# Altium PCB HLK-7621-ALL-KIT-V2.4.PcbDoc (part 1 of 2)
Units mm, origin at the board's own origin, x right, y up, seen from the top; angles counter-clockwise.
Board outline 140 x 100 mm, 2 copper layers (Top Layer, Bottom Layer); 119 components, 240 nets, 725 pads, 586 vias.
Unrouted connection lines stored in the file: 2.
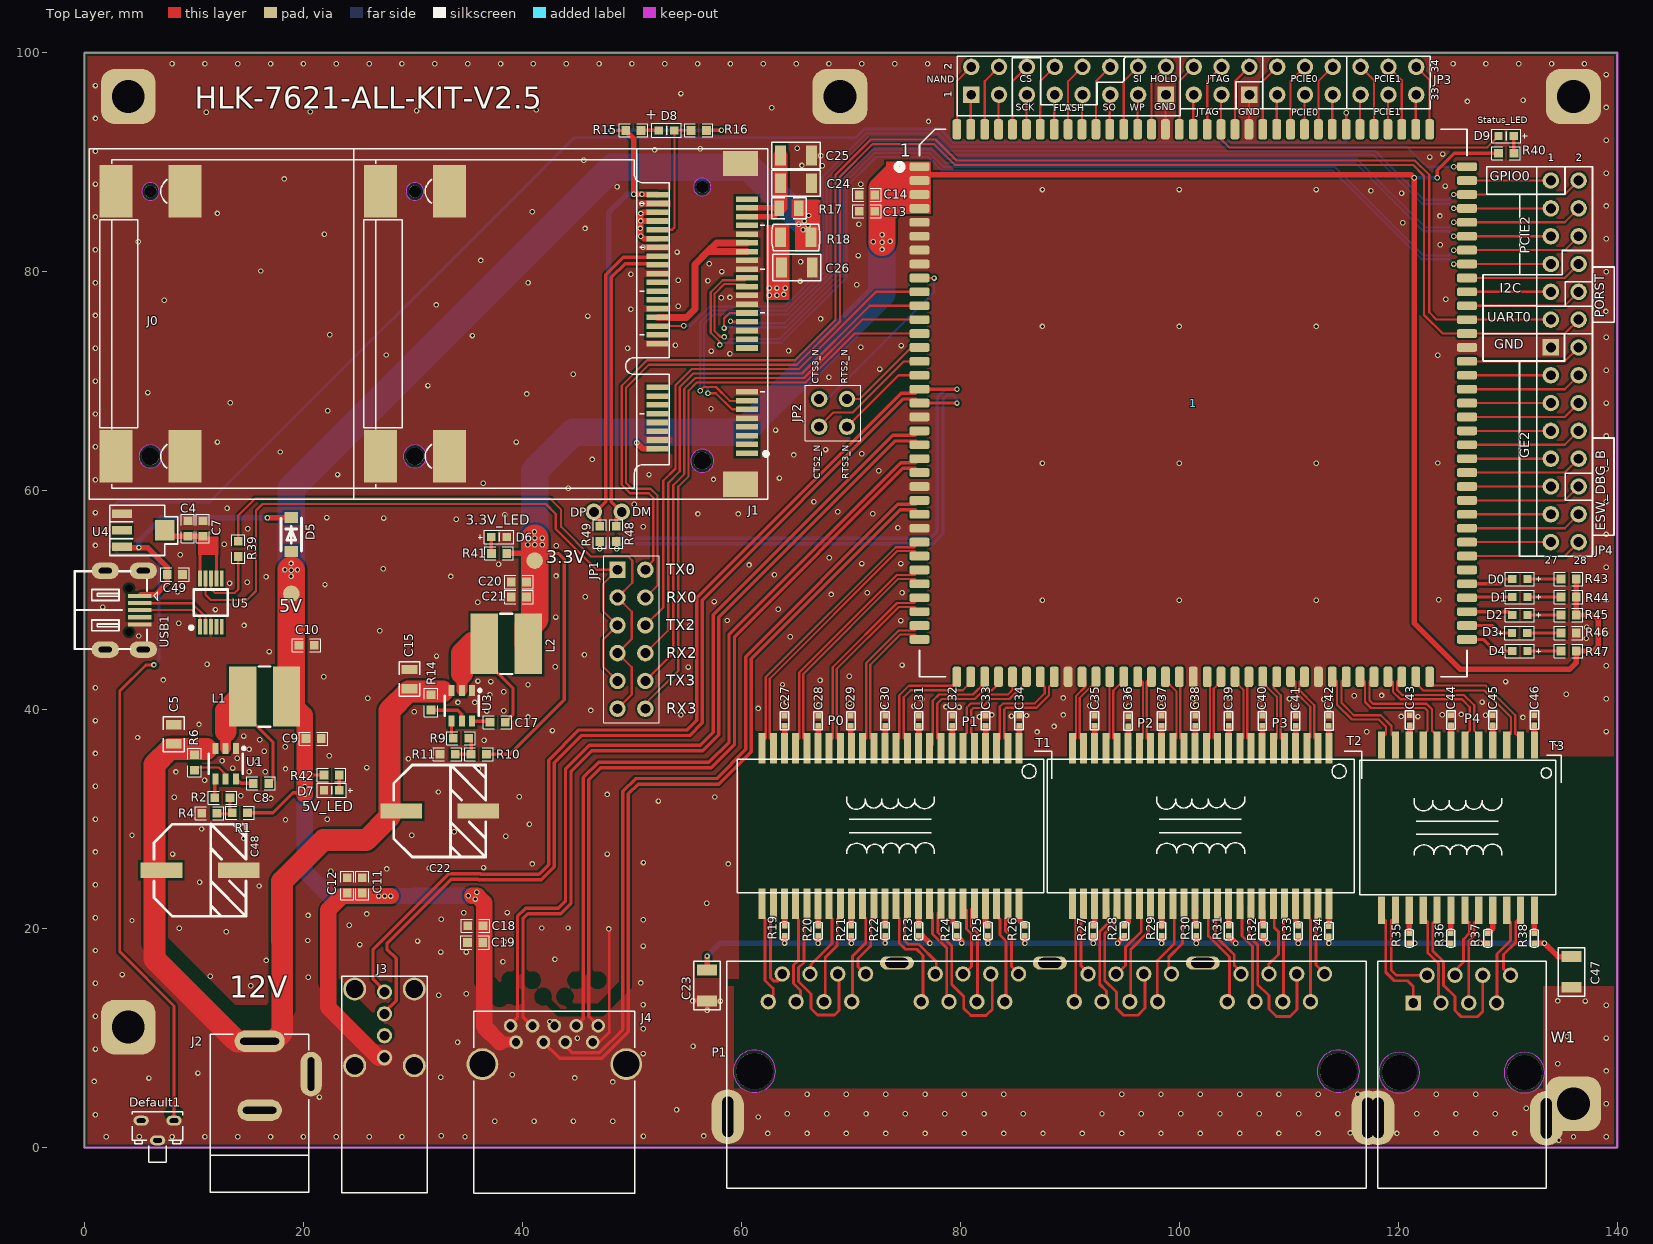
[diagram p0: Top Layer view]
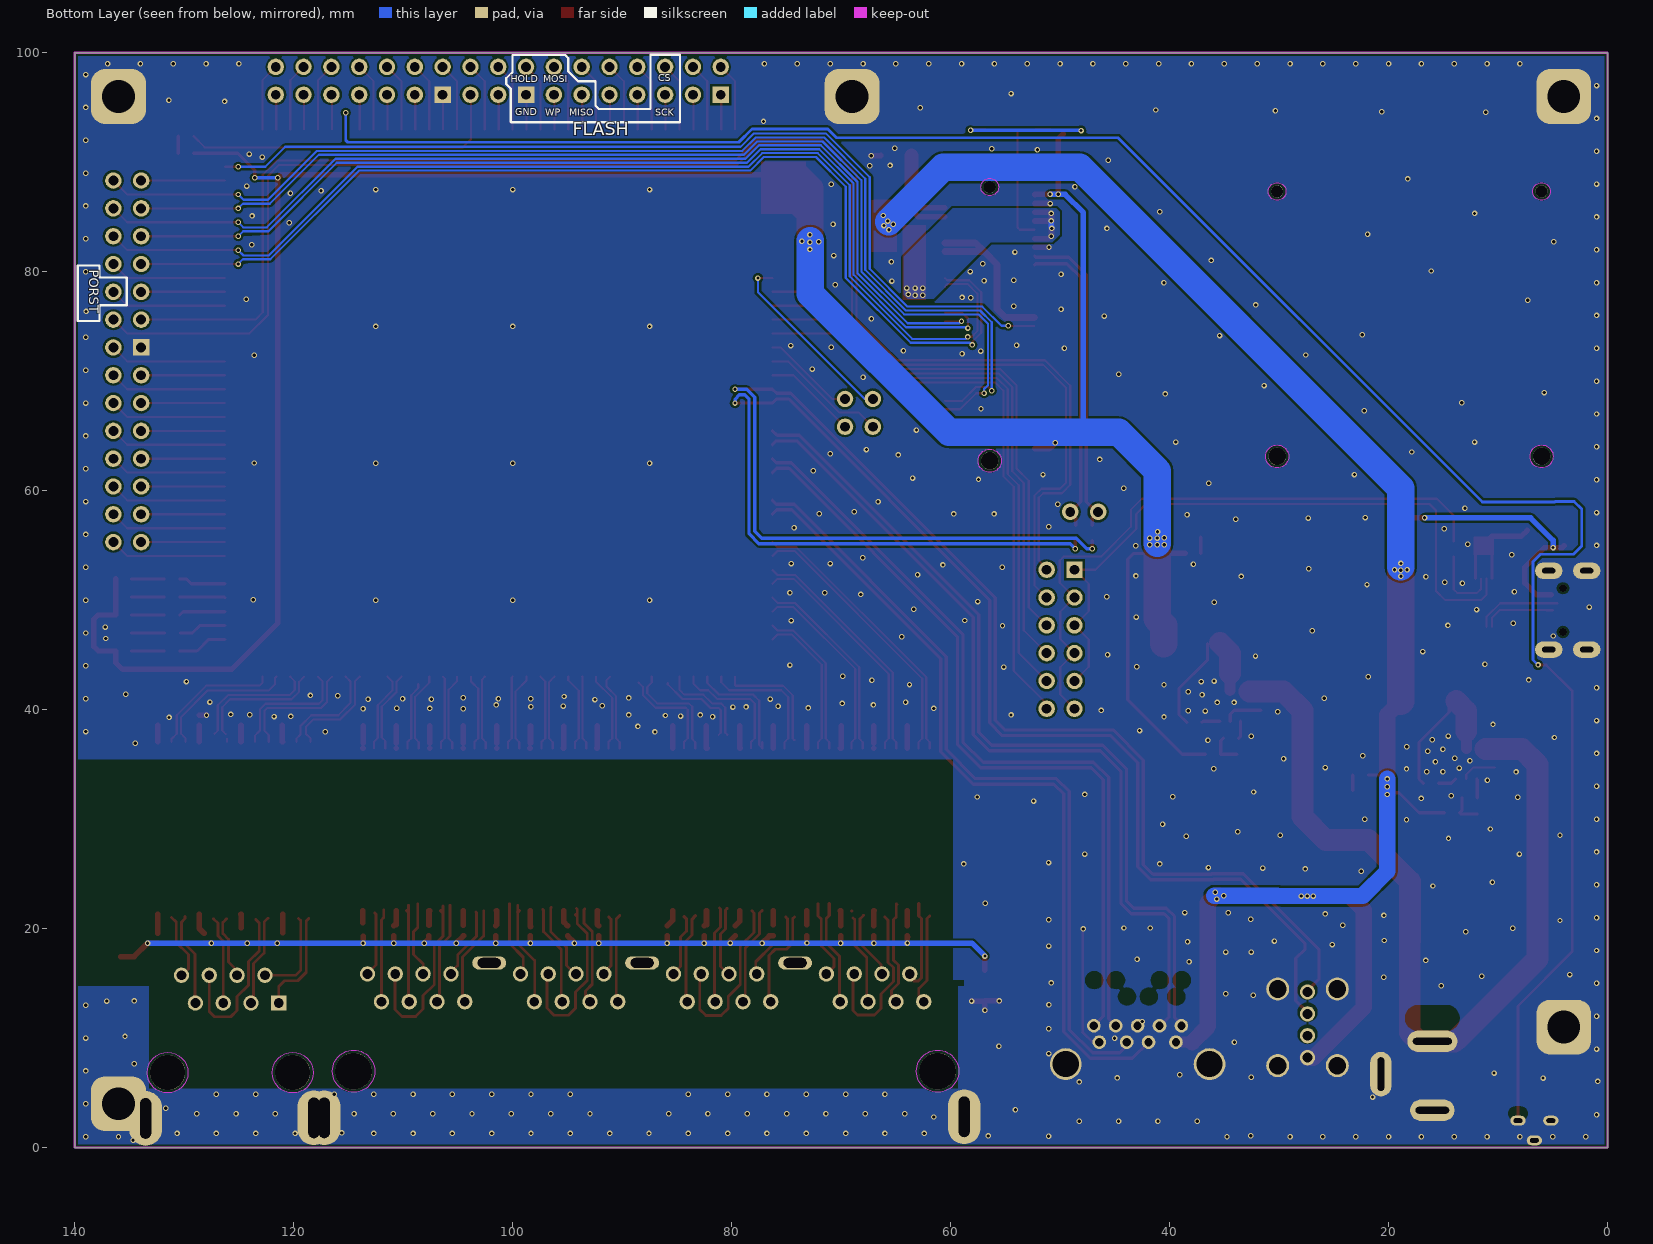
[diagram p1: Bottom Layer view, seen from below]

## Layer stack, top to bottom
Top Layer: signal copper 0.0356
Dielectric: core 0.32, FR-4, Dk 4.8
Bottom Layer: signal copper 0.0356

## Board outline
0,0 140,0 140,100 0,100

## Design rules (kind name [scope] priority, off if disabled: settings)
Clearance [All] p1: gap=0.2
PlaneConnect [All] p1: planeconnectstyle=Direct reliefexpansion=0.508 reliefentries=4 reliefconductorwidth=0.254 reliefairgap=0.254
PolygonConnect [All] p1: connectstyle=Direct reliefconductorwidth=0.254 reliefentries=4 polygonreliefangle="90 Angle"
RoutingVias [All] p1: holewidth=0.3 width=0.5 viastyle="Through Hole" minholewidth=0.3 minwidth=0.5 maxholewidth=0.711 maxwidth=1.27
SilkscreenOverComponentPads [IsPad] p1: minsilkscreentomaskgap=0.254
SolderMaskExpansion [All] p1: expansion=0.05
TestPointUsage [All] p1: valid=0 allowmultiple=FALSE
Testpoint [(IsPad And (OnTopLayer Or OnBottomLayer))] p1: side=3 testpointundercomponent=TRUE minsize=1.016 maxsize=2.54 preferedsize=1.524 minholesize=0 maxholesize=1.016 preferedholesize=0.813 testpointgrid=0.025 style=297 order=0123456789
Width [All] p1: maxlimit=2.54 minlimit=0.152 preferedwidth=0.254
22 further rules are at their usual default settings.

## Components (designator, comment, footprint, x,y, rotation, side; value= is the part's Value field where it differs from the comment)
1 "7621" HLK-7621 76.27,89.59 r0 top
C4 "10uF" 0603 9.446,56.544 r90 top
C5 "10uF/25V" L0805 8.151,37.76 r90 top
C7 "0.1uF" 0603 10.818,56.544 r90 top
C8 "1uF/25V" 0603 16.127,33.264 r180 top
C9 "22uf" 0603 20.927,37.353 r0 top
C10 "22uF" 0603 20.292,45.888 r0 top
C11 "22uF" 0603 25.372,23.942 r90 top
C12 "0.1uF" 0603 24.001,23.942 r90 top
C13 "0.1uF" 0603 71.473,85.512 r180 top
C14 "22uF" 0603 71.473,87.01 r180 top
C15 "10uF/25V" L0805 29.69,42.789 r90 top
C17 "1uF/25V" 0603 37.742,38.852 r180 top
C18 "22uF" 0603 35.71,20.259 r180 top
C19 "0.1uF" 0603 35.685,18.735 r180 top
C20 "47uF" 0603 39.672,51.653 r180 top
C21 "47uF" 0603 39.672,50.282 r180 top
C22 "220UF/35V" CAP_SMT_8*10.5 28.928,30.749 r90 top
C23 "1nF" C1206 56.866,14.805 r270 top
C24 "10uF" C1206 64.985,88.08 r0 top
C25 "10uF" C1206 64.985,90.62 r0 top
C26 "10uF" C1206 65.07,80.391 r0 top
C27 "0.1uF" C0402 63.937,38.98 r270 top
C28 "0.1uF" C0402 67.003,38.98 r270 top
C29 "0.1uF" C0402 70,38.98 r270 top
C30 "0.1uF" C0402 73.124,38.98 r270 top
C31 "0.1uF" C0402 76.198,38.979 r270 top
C32 "0.1uF" C0402 79.246,38.979 r270 top
C33 "0.1uF" C0402 82.294,38.98 r270 top
C34 "0.1uF" C0402 85.367,38.98 r270 top
C35 "0.1uF" C0402 92.25,38.979 r270 top
C36 "0.1uF" C0402 95.324,38.953 r270 top
C37 "0.1uF" C0402 98.372,38.97 r270 top
C38 "0.1uF" C0402 101.445,38.97 r270 top
C39 "0.1uF" C0402 104.493,38.97 r270 top
C40 "0.1uF" C0402 107.567,38.97 r270 top
C41 "0.1uF" C0402 110.615,38.97 r270 top
C42 "0.1uF" C0402 113.663,38.97 r270 top
C43 "0.1uF" C0402 121.029,39.038 r270 top
C44 "0.1uF" C0402 124.813,39.038 r270 top
C45 "0.1uF" C0402 128.623,39.038 r270 top
C46 "0.1uF" C0402 132.433,39.038 r270 top
C47 "1nF" C1206 135.811,16.043 r270 top
C48 "220UF/35v" CAP_SMT_8*10.5 7.033,25.339 r90 top
C49 "10uF" 0603 8.253,52.339 r180 top
D0 "P0_LED" 0603LED#1 131.798,51.933 r180 top
D1 "P1_LED" 0603LED#1 131.798,50.288 r180 top
D2 "P2_LED" 0603LED#1 131.798,48.644 r180 top
D3 "P3_LED" 0603LED#1 130.376,46.999 r0 top
D4 "P4_LED" 0603LED#1 131.798,45.354 r180 top
D5 "A7-C129828" SOD-123F_L2.8-W1.8-LS3.7-RD 18.888,55.979 r270 top (schematic designator U1)
D6 "3.3V_LED" 0603LED#2 37.891,55.717 r180 top (schematic designator D3)
D7 "5V_LED" 0603LED#2 22.553,32.68 r0 top (schematic designator D4)
D8 "LED" 0603LED#3 53.185,92.852 r180 top (schematic designator D2)
D9 "LED" 0603LED#2 129.83,92.443 r0 top (schematic designator D2)
Default1 "SW-PB" K5 6.68,0.66 r270 top
J1 "" CONSG/54/MINICARD/AS0B22-S68-7F/HALF/FUL 56.425,75.227 r90 top locked
J2 "PWR2.5" CON\DC-JACK\4.7 16,9.709 r90 top
J3 "" USB/4P/P2.0/DIP/R/F/SUA-110VB-B2N 27.402,8.214 r270 top
J4 "USB3.0" USB3.0/9P/DIP/MAINSUPER 39.421,9.627 r0 top
JP1 "" HDR2X6 48.687,52.781 r270 top
JP2 "" HDR2X2 69.642,65.837 r90 top
JP3 "" HDR2X17#1 80.996,96.164 r0 top
JP4 "2" HDR2X17#2 133.929,88.32 r270 top
L1 "6.8uH" "4.7uH SMD,5.8x5.2x4.5mm" 16.457,41.189 r0 top
L2 "6.8uH" "4.7uH SMD,5.8x5.2x4.5mm" 38.529,46.015 r0 top
P1 "Component_2" PHJ8X4_N 61.188,6.975 r180 top
R1 "10.5K/1%" 0603 14.196,30.571 r180 top
R2 "1K/1%" 0603 12.596,31.943 r180 top
R4 "2K/1%" 0603 11.402,30.546 r0 top
R6 "100K" 0603 10.056,35.169 r90 top
R9 "1K" 0603 34.389,37.379 r180 top
R10 "6.2K/1%" 0603 36.015,35.931 r180 top
R11 "2K/1%" 0603 33.17,35.931 r0 top
R14 "100K" 0603 31.646,40.655 r90 top
R15 "330R" 0603 50.137,92.903 r180 top
R16 "4.7K" 0603 56.106,92.903 r180 top
R17 "0R" L0805 64.35,85.794 r0 top
R18 "0R" R1206 64.965,83.134 r180 top
R19 "75R" R0402 63.942,19.795 r90 top
R20 "75R" R0402 67,19.788 r90 top
R21 "75R" R0402 70.048,19.788 r90 top
R22 "75R" R0402 73.124,19.802 r90 top
R23 "75R" R0402 76.195,19.788 r90 top
R24 "75R" R0402 79.675,19.788 r90 top
R25 "75R" R0402 82.52,19.788 r90 top
R26 "75R" R0402 85.898,19.788 r90 top
R27 "75R" R0402 92.131,19.788 r90 top
R28 "75R" R0402 94.976,19.788 r90 top
R29 "75R" R0402 98.38,19.788 r90 top
R30 "75R" R0402 101.555,19.788 r90 top
R31 "75R" R0402 104.501,19.788 r90 top
R32 "75R" R0402 107.651,19.788 r90 top
R33 "75R" R0402 110.866,19.788 r90 top
R34 "75R" R0402 113.663,19.776 r90 top
R35 "75R" R0402 121.003,19.116 r90 top
R36 "75R" R0402 124.796,19.116 r90 top
R37 "75R" R0402 128.163,19.116 r90 top
R38 "75R" R0402 132.416,19.116 r90 top
R39 "4.7K" 0603 14.044,54.676 r90 top
R40 "1K" 0603 129.854,90.82 r0 top
R41 "2K" 0603 37.88,54.27 r180 top
R42 "3K" 0603 22.578,34.026 r0 top
R43 "1K" 0603 135.557,51.933 r180 top
R44 "1K" 0603 135.557,50.288 r180 top
R45 "1K" 0603 135.557,48.644 r180 top
R46 "1K" 0603 135.557,46.999 r180 top
R47 "1K" 0603 135.557,45.354 r180 top
R48 "NC" 0603 48.562,56.048 r270 top (schematic designator R41)
R49 "NC" 0603 47.064,56.048 r270 top (schematic designator R41)
T1 "HN4824CG" TRANSFORMER/48P/SMD/GS5014LF 73.632,29.378 r180 top locked
T2 "HN4824CG" TRANSFORMER/48P/SMD/GS5014LF 101.953,29.378 r180 top locked
T3 "HN2409CG" TRANSFORMER/24P/SMD/HN2429CG 125.448,29.225 r180 top
U1 "MP1470" MP1470 12.901,35.067 r180 top
U3 "MP1470" MP1470 34.465,40.35 r180 top
U4 "AMS1117-3.3" 1117 3.35,57.902 r270 top
U5 "CH340E" MSOP-10 11.555,49.774 r0 top
USB1 "USB1" USB-MICRO_D 1.903,49.088 r270 top
W1 "Component_3" PCBComponent_1 131.519,6.85 r0 top locked

## Footprints (in the part's own frame and the unit in brackets; to place one, negate y for a bottom-side part, rotate by r counter-clockwise, add the part's x,y. Pads: shape width x height; smd on the part's side, far side on the other; paste and mask are expansions set on the pad)
"4.7uH SMD,5.8x5.2x4.5mm" [mm] "SMD,5.8x5.2x4.5mm"
  rect 2.5x5.5 smd: 1(-2,0) 2(2,0)
  silkscreen extent -0.55,-2.75 0.55,2.75
0603 [mm]
  rect 0.8x0.8 smd: 1(-0.7,0) 2(0.7,0)
  silkscreen extent -1.3,-0.6 1.3,0.6
0603LED#1 [mil] "0603贴片LED"
  rect 30x30 smd: 1(0,0) 2(55,0)
  silkscreen extent -48,-25 80,25
0603LED#2 [mil]
  rect 30x30 smd: 1(28.49,-1.91) 2(-26.51,-1.91)
  silkscreen extent -52,-27 76,23
0603LED#3 [mil]
  rect 30x30 smd: 1(-26.51,-1.91) 2(28.49,-1.91)
  silkscreen extent -52,-27 53,23
1117 [mm]
  rect 1.9x1.8 smd: 0(1.52,3.97)
  rect 0.75x1.8 smd: 1(0.02,0.07) 2(1.52,0.07) 3(3.02,0.07)
  silkscreen extent -0.78,-1.03 3.82,5.17, body extent -0.73,0.14 3.77,4.14, height 1.5
C0402 [mil]
  rect 20x20 smd: 1(-18,0) 2(18,0)
  silkscreen extent -33,-15 33,15
C1206 [mm]
  rect 1x1.8 smd: 1(-1.4,0) 2(1.4,0)
  silkscreen extent -2.2,-1.2 2.2,1.2
CAP_SMT_8*10.5 [mm]
  rect 1.4x3.8 smd: 1(0,0) 2(0,-7.051)
  silkscreen extent -4.22,-7.71 4.21,0.69
CON\DC-JACK\4.7 [mm]
  oval 1.956x4.572 hole 0.6 slot 3.556 at 90 deg: 1(0,0)
  oval 1.956x4.064 hole 0.6 slot 3.048 at 90 deg: 2(-6.3,0)
  oval 4.064x1.956 hole 0.6 slot 3.048 at 0 deg: 3(-3,-4.7)
  silkscreen extent -13.8,-4.5 0.65,4.5
CONSG/54/MINICARD/AS0B22-S68-7F/HALF/FUL [mm]
  rect 0.508x2 smd: 1(-11.8,-4.1) 2(-11.4,4.1) 3(-11,-4.1) 4(-10.6,4.1) 5(-10.2,-4.1) 6(-9.8,4.1) 7(-9.4,-4.1) 8(-9,4.1) 9(-8.6,-4.1) 10(-8.2,4.1) 11(-7.8,-4.1) 12(-7.4,4.1) 13(-7,-4.1) 14(-6.6,4.1) 15(-6.2,-4.1) 16(-5.8,4.1) 17(-2.2,-4.1) 18(-1.8,4.1) 19(-1.4,-4.1) 20(-1,4.1) 21(-0.6,-4.1) 22(-0.2,4.1) 23(0.2,-4.1) 24(0.6,4.1) 25(1,-4.1) 26(1.4,4.1) 27(1.8,-4.1) 28(2.2,4.1) 29(2.6,-4.1) 30(3,4.1) 31(3.4,-4.1) 32(3.8,4.1) 33(4.2,-4.1) 34(4.6,4.1) 35(5,-4.1) 36(5.4,4.1) 37(5.8,-4.1) 38(6.2,4.1) 39(6.6,-4.1) 40(7,4.1) 41(7.4,-4.1) 42(7.8,4.1) 43(8.2,-4.1) 44(8.6,4.1) 45(9,-4.1) 46(9.4,4.1) 47(9.8,-4.1) 48(10.2,4.1) 49(10.6,-4.1) 50(11,4.1) 51(11.4,-4.1) 52(11.8,4.1)
  round 1.6 hole 1.6 unplated: 53(-12.5,0) 61(-12.1,26.25) 67(-12.1,50.4)
  round 1.1 hole 1.1 unplated: 54(12.5,0) 62(12.1,26.25) 68(12.1,50.4)
  rect 2.3x3.2 smd: 55(-14.65,-3.5) 56(14.65,-3.5)
  rect 4.8x3 smd: 57(-12.1,23.1) 58(12.1,23.1) 59(-12.1,29.4) 60(12.1,29.4) 63(-12.1,47.25) 64(12.1,47.25) 65(-12.1,53.55) 66(12.1,53.55)
  Keep-Out Layer pour cut-out: 13.304,0 13.243,0.308 13.069,0.569 12.808,0.743 12.5,0.804 12.5,0.804 12.192,0.743 11.931,0.569 11.757,0.308 11.696,0 11.696,0 11.757,-0.308 11.931,-0.569 12.192,-0.743 12.5,-0.804 12.5,-0.804 12.808,-0.743 13.069,-0.569 13.243,-0.308 13.304,0
  Keep-Out Layer pour cut-out: -11.446,0 -11.526,0.403 -11.755,0.745 -12.097,0.974 -12.5,1.054 -12.5,1.054 -12.903,0.974 -13.245,0.745 -13.474,0.403 -13.554,0 -13.554,0 -13.474,-0.403 -13.245,-0.745 -12.903,-0.974 -12.5,-1.054 -12.5,-1.054 -12.097,-0.974 -11.755,-0.745 -11.526,-0.403 -11.446,0
  Keep-Out Layer pour cut-out: 12.904,26.25 12.843,26.558 12.669,26.819 12.408,26.993 12.1,27.054 12.1,27.054 11.792,26.993 11.531,26.819 11.357,26.558 11.296,26.25 11.296,26.25 11.357,25.942 11.531,25.681 11.792,25.507 12.1,25.446 12.1,25.446 12.408,25.507 12.669,25.681 12.843,25.942 12.904,26.25
  Keep-Out Layer pour cut-out: -11.046,26.25 -11.126,26.653 -11.355,26.995 -11.697,27.224 -12.1,27.304 -12.1,27.304 -12.503,27.224 -12.845,26.995 -13.074,26.653 -13.154,26.25 -13.154,26.25 -13.074,25.847 -12.845,25.505 -12.503,25.276 -12.1,25.196 -12.1,25.196 -11.697,25.276 -11.355,25.505 -11.126,25.847 -11.046,26.25
  Keep-Out Layer pour cut-out: 12.904,50.4 12.843,50.708 12.669,50.969 12.408,51.143 12.1,51.204 12.1,51.204 11.792,51.143 11.531,50.969 11.357,50.708 11.296,50.4 11.296,50.4 11.357,50.092 11.531,49.831 11.792,49.657 12.1,49.596 12.1,49.596 12.408,49.657 12.669,49.831 12.843,50.092 12.904,50.4
  Keep-Out Layer pour cut-out: -11.046,50.4 -11.126,50.803 -11.355,51.145 -11.697,51.374 -12.1,51.454 -12.1,51.454 -12.503,51.374 -12.845,51.145 -13.074,50.803 -13.154,50.4 -13.154,50.4 -13.074,49.997 -12.845,49.655 -12.503,49.426 -12.1,49.346 -12.1,49.346 -11.697,49.426 -11.355,49.655 -11.126,49.997 -11.046,50.4
  silkscreen extent -16,-6.16 16,56
HDR2X2 [mm] "Connector; Header; 2x2 Position"
  round 1.5 hole 0.9: 1(0,0) 2(0,2.54) 3(2.54,0) 4(2.54,2.54)
  silkscreen extent -1.27,-1.27 3.81,3.81
HDR2X6 [mm] "Connector; Header; 6x2 Position"
  rect 1.5x1.5 hole 0.9: 1(0,0)
  round 1.5 hole 0.9: 2(0,2.54) 3(2.54,0) 4(2.54,2.54) 5(5.08,0) 6(5.08,2.54) 7(7.62,0) 8(7.62,2.54) 9(10.16,0) 10(10.16,2.54) 11(12.7,0) 12(12.7,2.54)
  silkscreen extent -1.27,-1.27 13.97,3.81
HDR2X17#1 [mm] "Connector; Header; 17x2 Position"
  rect 1.5x1.5 hole 0.9: 1(0,0) 15(17.78,0) 21(25.4,0)
  round 1.5 hole 0.9: 2(0,2.54) 3(2.54,0) 4(2.54,2.54) 5(5.08,0) 6(5.08,2.54) 7(7.62,0) 8(7.62,2.54) 9(10.16,0) 10(10.16,2.54) 11(12.7,0) 12(12.7,2.54) 13(15.24,0) 14(15.24,2.54) 16(17.78,2.54) 17(20.32,0) 18(20.32,2.54) 19(22.86,0) 20(22.86,2.54) 22(25.4,2.54) 23(27.94,0) 24(27.94,2.54) 25(30.48,0) 26(30.48,2.54) 27(33.02,0) 28(33.02,2.54) 29(35.56,0) 30(35.56,2.54) 31(38.1,0) 32(38.1,2.54) 33(40.64,0) 34(40.64,2.54)
  silkscreen extent -1.27,-1.27 41.91,3.52
HDR2X17#2 [mm] "Connector; Header; 17x2 Position"
  round 1.5 hole 0.9: 1(0,0) 2(0,2.54) 3(2.54,0) 4(2.54,2.54) 5(5.08,0) 6(5.08,2.54) 7(7.62,0) 8(7.62,2.54) 9(10.16,0) 10(10.16,2.54) 11(12.7,0) 12(12.7,2.54) 14(15.24,2.54) 15(17.78,0) 16(17.78,2.54) 17(20.32,0) 18(20.32,2.54) 19(22.86,0) 20(22.86,2.54) 21(25.4,0) 22(25.4,2.54) 23(27.94,0) 24(27.94,2.54) 25(30.48,0) 26(30.48,2.54) 27(33.02,0) 28(33.02,2.54)
  rect 1.5x1.5 hole 0.9: 13(15.24,0)
  silkscreen extent -1.27,-1.27 34.3,3.81
HLK-7621 [mm]
  rrect50% 1.85x0.8 smd: 1(0,0) 2(0,-1.27) 3(0,-2.54) 4(0,-3.81) 5(0,-5.08) 6(0,-6.35) 7(0,-7.62) 8(0,-8.89) 9(0,-10.16) 10(0,-11.43) 11(0,-12.7) 12(0,-13.97) 13(0,-15.24) 14(0,-16.51) 15(0,-17.78) 16(0,-19.05) 17(0,-20.32) 18(0,-21.59) 19(0,-22.86) 20(0,-24.13) 21(0,-25.4) 22(0,-26.67) 23(0,-27.94) 24(0,-29.21) 25(0,-30.48) 26(0,-31.75) 27(0,-33.02) 28(0,-34.29) 29(0,-35.56) 30(0,-36.83) 31(0,-38.1) 32(0,-39.37) 33(0,-40.64) 34(0,-41.91) 35(0,-43.18) 71(50,-43.18) 72(50,-41.91) 73(50,-40.64) 74(50,-39.37) 75(50,-38.1) 76(50,-36.83) 77(50,-35.56) 78(50,-34.29) 79(50,-33.02) 80(50,-31.75) 81(50,-30.48) 82(50,-29.21) 83(50,-27.94) 84(50,-26.67) 85(50,-25.4) 86(50,-24.13) 87(50,-22.86) 88(50,-21.59) 89(50,-20.32) 90(50,-19.05) 91(50,-17.78) 92(50,-16.51) 93(50,-15.24) 94(50,-13.97) 95(50,-12.7) 96(50,-11.43) 97(50,-10.16) 98(50,-8.89) 99(50,-7.62) 100(50,-6.35) 101(50,-5.08) 102(50,-3.81) 103(50,-2.54) 104(50,-1.27) 105(50,0)
  rrect50% 0.8x1.85 smd: 36(3.41,-46.59) 37(4.68,-46.59) 38(5.95,-46.59) 39(7.22,-46.59) 40(8.49,-46.59) 41(9.76,-46.59) 42(11.03,-46.59) 43(12.3,-46.59) 44(13.57,-46.59) 45(14.84,-46.59) 46(16.11,-46.59) 47(17.38,-46.59) 48(18.65,-46.59) 49(19.92,-46.59) 50(21.19,-46.59) 51(22.46,-46.59) 52(23.73,-46.59) 53(25,-46.59) 54(26.27,-46.59) 55(27.54,-46.59) 56(28.81,-46.59) 56(28.81,-46.59) 57(30.08,-46.59) 58(31.35,-46.59) 59(32.62,-46.59) 60(33.89,-46.59) 61(35.16,-46.59) 62(36.43,-46.59) 63(37.7,-46.59) 64(38.97,-46.59) 65(40.24,-46.59) 66(41.51,-46.59) 67(42.78,-46.59) 68(44.05,-46.59) 69(45.32,-46.59) 70(46.59,-46.59) 106(46.59,3.41) 107(45.32,3.41) 108(44.05,3.41) 109(42.78,3.41) 110(41.51,3.41) 111(40.24,3.41) 112(38.97,3.41) 113(37.7,3.41) 114(36.43,3.41) 115(35.16,3.41) 116(33.89,3.41) 117(32.62,3.41) 118(31.35,3.41) 119(30.08,3.41) 120(28.81,3.41) 121(27.54,3.41) 122(26.27,3.41) 123(25,3.41) 124(23.73,3.41) 125(22.46,3.41) 126(21.19,3.41) 127(19.92,3.41) 128(18.65,3.41) 129(17.38,3.41) 130(16.11,3.41) 131(14.84,3.41) 132(13.57,3.41) 133(12.3,3.41) 134(11.03,3.41) 135(9.76,3.41) 136(8.49,3.41) 137(7.22,3.41) 138(5.95,3.41) 139(4.68,3.41) 140(3.41,3.41)
  silkscreen extent -2.12,-46.59 50,3.41
K5 [mm]
  oval 0.9x1.4 hole 0.4 slot 0.8 at 90 deg: 1(-1.8,1.5) 2(-1.8,-1.5) 3(0,0)
  silkscreen extent -2.6,-2.3 2,2.3
L0805 [mil]
  rect 34x56 smd: 1(-34.45,0) 2(34.45,0)
  silkscreen extent -62,-38 62,38
MP1470 [mm]
  rect 0.55x1 smd: 1(-0.95,-1.4) 2(0,-1.4) 3(0.95,-1.4) 4(0.95,1.4) 5(0,1.4) 6(-0.95,1.4)
  silkscreen extent -1.78,-1.52 1.55,0.9
MSOP-10 [mm]
  rect 0.33x1.45 smd: 1(-1,-2.2) 2(-0.5,-2.2) 3(0,-2.2) 4(0.5,-2.2) 5(1,-2.2) 6(1,2.2) 7(0.5,2.2) 8(0,2.2) 9(-0.5,2.2) 10(-1,2.2)
  silkscreen extent -1.95,-2.44 1.53,1.2
PCBComponent_1 [mm]
  rect 1.4x1.4 / inner round 1.4 / far side rect 1.4x1.4 hole 0.9: 1(-10.16,6.35)
  round 1.4 hole 0.9: 2(-8.89,8.89) 3(-7.62,6.35) 4(-6.35,8.89) 5(-5.08,6.35) 6(-3.81,8.89) 7(-2.54,6.35) 8(-1.27,8.89)
  round 3.2 hole 3.2 unplated: 9(-11.43,0) 9(0,0)
  oval 3x5 hole 1 slot 3.7 at 90 deg: 10(2.005,-4.185)
  Keep-Out Layer pour cut-out: -9.567,0 -9.603,0.363 -9.709,0.713 -9.881,1.035 -10.113,1.317 -10.395,1.549 -10.717,1.721 -11.067,1.827 -11.43,1.863 -11.793,1.827 -12.143,1.721 -12.465,1.549 -12.747,1.317 -12.979,1.035 -13.151,0.713 -13.257,0.363 -13.293,0 -13.257,-0.363 -13.151,-0.713 -12.979,-1.035 -12.747,-1.317 -12.465,-1.549 -12.143,-1.721 -11.793,-1.827 -11.43,-1.863 -11.067,-1.827 -10.717,-1.721 -10.395,-1.549 -10.113,-1.317 -9.881,-1.035 -9.709,-0.713 -9.603,-0.363
  Keep-Out Layer pour cut-out: 1.863,0 1.827,0.363 1.721,0.713 1.549,1.035 1.317,1.317 1.035,1.549 0.713,1.721 0.363,1.827 0,1.863 -0.363,1.827 -0.713,1.721 -1.035,1.549 -1.317,1.317 -1.549,1.035 -1.721,0.713 -1.827,0.363 -1.863,0 -1.827,-0.363 -1.721,-0.713 -1.549,-1.035 -1.317,-1.317 -1.035,-1.549 -0.713,-1.721 -0.363,-1.827 0,-1.863 0.363,-1.827 0.713,-1.721 1.035,-1.549 1.317,-1.317 1.549,-1.035 1.721,-0.713 1.827,-0.363
  silkscreen extent -13.41,-10.55 1.98,10.15
PHJ8X4_N [mil]
  round 55 hole 35: 1(-50,-250) 2(-100,-350) 3(-150,-250) 4(-200,-350) 5(-250,-250) 6(-300,-350) 7(-350,-250) 8(-400,-350) 9(-600,-250) 10(-650,-350) 11(-700,-250) 12(-750,-350) 13(-800,-250) 14(-850,-350) 15(-900,-250) 16(-950,-350) 17(-1150,-250) 18(-1200,-350) 19(-1250,-250) 20(-1300,-350) 21(-1350,-250) 22(-1400,-350) 23(-1450,-250) 24(-1500,-350) 25(-1700,-250) 26(-1750,-350) 27(-1800,-250) 28(-1850,-350) 29(-1900,-250) 30(-1950,-350) 31(-2000,-250) 32(-2050,-350)
  round 132 hole 132 unplated: 33(-2100,0) 34(0,0)
  Keep-Out Layer pour cut-out: -2024,0 -2029.79,29.08 -2046.26,53.74 -2070.92,70.21 -2100,76 -2100,76 -2129.08,70.21 -2153.74,53.74 -2170.21,29.08 -2176,0 -2176,0 -2170.21,-29.08 -2153.74,-53.74 -2129.08,-70.21 -2100,-76 -2100,-76 -2070.92,-70.21 -2046.26,-53.74 -2029.79,-29.08 -2024,0
  Keep-Out Layer pour cut-out: 76,0 70.21,29.08 53.74,53.74 29.08,70.21 0,76 0,76 -29.08,70.21 -53.74,53.74 -70.21,29.08 -76,0 -76,0 -70.21,-29.08 -53.74,-53.74 -29.08,-70.21 0,-76 0,-76 29.08,-70.21 53.74,-53.74 70.21,-29.08 76,0
  silkscreen extent -2200,-395 100,420
R0402 [mil]
  rect 20x20 smd: 1(-18,0) 2(18,0)
  silkscreen extent -33,-15 33,15
R1206 [mm]
  rect 1x1.8 smd: 1(-1.4,0) 2(1.4,0)
  silkscreen extent -2.2,-1.2 2.2,1.2
SOD-123F_L2.8-W1.8-LS3.7-RD [mm]
  rect 1x1.2 smd: 1(-1.55,0) 2(1.55,0)
  silkscreen extent -1.52,-0.93 1.49,0.95
TRANSFORMER/24P/SMD/HN2429CG [mm]
  rect 0.66x2.5 smd: 1(-6.985,-7.55) 2(-5.715,-7.55) 3(-4.445,-7.55) 4(-3.175,-7.55) 5(-1.905,-7.55) 6(-0.635,-7.55) 7(0.635,-7.55) 8(1.905,-7.55) 9(3.175,-7.55) 10(4.445,-7.55) 11(5.715,-7.55) 12(6.985,-7.55) 13(6.985,7.55) 14(5.715,7.55) 15(4.445,7.55) 16(3.175,7.55) 17(1.905,7.55) 18(0.635,7.55) 19(-0.635,7.55) 20(-1.905,7.55) 21(-3.175,7.55) 22(-4.445,7.55) 23(-5.715,7.55) 24(-6.985,7.55)
  silkscreen extent -9.42,-6.62 8.95,6.15
TRANSFORMER/48P/SMD/GS5014LF [mm]
  rect 0.64x2.8 smd: 1(-11.73,-7.1) 2(-10.71,-7.1) 3(-9.69,-7.1) 4(-8.67,-7.1) 5(-7.65,-7.1) 6(-6.63,-7.1) 7(-5.61,-7.1) 8(-4.59,-7.1) 9(-3.57,-7.1) 10(-2.55,-7.1) 11(-1.53,-7.1) 12(-0.51,-7.1) 13(0.51,-7.1) 14(1.53,-7.1) 15(2.55,-7.1) 16(3.57,-7.1) 17(4.59,-7.1) 18(5.61,-7.1) 19(6.63,-7.1) 20(7.65,-7.1) 21(8.67,-7.1) 22(9.69,-7.1) 23(10.71,-7.1) 24(11.73,-7.1) 25(11.73,7.1) 26(10.71,7.1) 27(9.69,7.1) 28(8.67,7.1) 29(7.65,7.1) 30(6.63,7.1) 31(5.61,7.1) 32(4.59,7.1) 33(3.57,7.1) 34(2.55,7.1) 35(1.53,7.1) 36(0.51,7.1) 37(-0.51,7.1) 38(-1.53,7.1) 39(-2.55,7.1) 40(-3.57,7.1) 41(-4.59,7.1) 42(-5.61,7.1) 43(-6.63,7.1) 44(-7.65,7.1) 45(-8.67,7.1) 46(-9.69,7.1) 47(-10.71,7.1) 48(-11.73,7.1)
  silkscreen extent -14.69,-6.83 14,6.1
USB3.0/9P/DIP/MAINSUPER [mm]
  round 1.25 hole 0.75: 1(0,0) 2(2.5,0) 3(4.5,0) 4(7,0) 5(7.5,1.5) 6(5.5,1.5) 7(3.5,1.5) 8(1.5,1.5) 9(-0.5,1.5)
  round 2.9 hole 2.4: 10(-3.07,-2) 11(10.07,-2)
  silkscreen extent -3.85,-13.78 10.85,2.82
USB-MICRO_D [mm] "micro型USB ，6.7*7.5*2.5mm"
  round 0 hole 0.7 unplated: 0(-2,2.17) 0(2,2.17)
  rect 0.381x2.15 smd: 1(-1.3,3.16) 2(-0.65,3.16) 3(0,3.16) 4(0.65,3.16) 5(1.3,3.16)
  oval 1.5x2.5 hole 0.5 slot 1.2 at 90 deg: 6(3.6,3.47) 7(3.6,0) 8(-3.6,0) 9(-3.6,3.47)
  silkscreen extent -3.56,-2.79 3.56,4.81
USB/4P/P2.0/DIP/R/F/SUA-110VB-B2N [mm]
  round 1.4 hole 0.9: 1(0,0) 2(-2,0) 3(-4,0) 4(-6,0)
  round 2.1 hole 1.6: 5(0.73,2.72) 6(0.73,-2.72) 7(-6.27,2.72) 8(-6.27,-2.72)
  silkscreen extent -7.44,-3.9 12.33,3.9

## Part data
C4 C7 C8 C9 C10 C11 C12 C13 C14 C15 C17 C18 C19 C20 C21 C23 C24 C25 C26 C27 C28 C29 C30 C31 C32 C33 C34 C35 C36 C37 C38 C39 C40 C41 C42 C43 C44 C45 C46 C47 C49: library part CAP, "Capacitor"
C5 C22 C48: library part "CAPACITOR POL", "Capacitor"
D0 D1 D2 D3 D4 D6 D7: library part LED
Default1: "Switch"
J1 JP1 U4: library part Component_1
J2: "Low Voltage Power Supply Connector"
J3 JP2 JP3: library part 2
J4: library part USB3.0/9P/DIP/MAINSUPER
L1 L2: library part INDUCTOR1
R1 R2 R4 R6 R9 R10 R11 R14 R15 R16 R17 R18 R19 R20 R21 R22 R23 R24 R25 R26 R27 R28 R29 R30 R31 R32 R33 R34 R35 R36 R37 R38 R39 R40 R41 R42 R43 R44 R45 R46 R47 R48 R49: library part Res2, "Resistor"
T1 T2 T3: library part TRANSFORMER/24P/SMD/HN2429CG
USB1: library part USB-B

## Free pads (board coordinates)
  round 1.5 smd: 0(18.895,50.587) 1(41.12,53.609)
  oval 3x5 hole 1 slot 3.7 at 90 deg mask+0: 0(58.758,2.815) 0(117.208,2.715) 0(118.158,2.715)
  rrect50% 5x5 hole 3: 1(4,11) 1(4,96) 1(69,96) 1(136,4) 1(136,96)
  oval 3.1x1.2 hole 0.9 slot 2.1 at 0 deg: ""(74.204,16.866) ""(88.174,16.866) ""(102.144,16.866)

## Via types
v1: diameter 0.5, hole 0.3, Top Layer to Bottom Layer, tented both sides, 584 vias
v2: diameter 1.5, hole 0.9, Top Layer to Bottom Layer, 2 vias

## Nets (pads, with @x,y where several pads share a name; then routed paths per layer and width w, separated by ;. In a path a pad name is that pad's centre, name@x,y a point inside that pad or via, vN(x,y) a via of type N, cw(c..) or ccw(c..) an arc to the next point about the centre after c; other vN are vias at no path point)
3.3V: 1.1 1.2 1.3 1.4 C13.1 C14.1 C20.1 C21.1 J1.2 J1.52 L2.2 pad.1@41.12,53.609 R10.1 R15.2 R16.1 R40.1 R41.1 R43.1 R44.1 R45.1 R47.1 | length 276
  Top Layer w0.3: R10.1@36.715,35.931 38.86,35.931 43.813,40.884 43.813,53.736 43.279,54.27 41.12,54.27 pad.1@41.019,54.27 ; 1.1@76.909,89.525 76.909,88.864 76.909,88.56 77.214,88.864 ; v1(123.556,88.572) 123.567,88.584 123.567,89.272 125.115,90.82 R40.1@129.154,90.82
  Top Layer w0.305: v1(48.085,92.89) 49.437,92.89 49.6,92.89 R15.2@49.633,92.857 ; R16.1@56.806,92.91 v1(58.179,92.91)
  Top Layer w0.5: R41.1@38.58,54.27 41.019,54.27 41.12,54.371 ; 74.953,88.941 75.029,88.864 76.27,88.864 76.909,88.864 77.214,88.864 121.156,88.864 v1(121.448,88.572) 121.448,47.907 125.677,43.678 135.634,43.678 136.257,44.302 R47.1@136.257,45.354 137.843,45.354 138.25,45.761 138.25,48.275 137.881,48.644 R45.1@136.257,48.644 R44.1@136.257,50.288 R43.1@136.257,51.933
  Top Layer w0.508: R15.2@49.731,92.573 50.176,92.127 v1(50.176,87.064) v1(50.913,87.064) 52.325,87.064 J1.52@52.325,87.027 ; v1(50.442,64.379) 50.994,63.827 J1.2@52.325,63.827
  Top Layer w0.6: 72.845,85.689 72.935,85.78 73.265,85.78 1.4@76.27,85.78 ; 72.845,87.594 73.389,87.05 1.3@76.27,87.05 1.3@76.291,87.071 ; 1.2@76.27,88.32 1.2@76.274,88.316
  Top Layer w2.5: L2.2@40.529,46.015 40.529,47.679 41.127,48.277 41.127,50.282 41.127,51.653 41.127,52.839 41.12,52.846 pad.1@41.12,53.609 41.12,54.27 41.12,54.371 v1(41.12,55.057) v1(41.12,55.667) ; v1(72.845,82.692) 72.845,82.743 72.845,82.768 v1(72.845,83.378) 72.845,85.359 ; 73.694,86.208 73.334,85.849 73.265,85.78 72.845,85.359 ; 75.512,88.737 73.988,88.737 72.845,87.594 72.845,87.01 72.845,85.689 72.845,85.512 72.845,85.359
  Bottom Layer w0.3: v1(121.448,88.572) v1(123.556,88.572)
  Bottom Layer w0.305: v1@48.288,92.903 v1@58.179,92.903
  Bottom Layer w0.508: 47.877,65.369 47.877,85.397 49.543,87.064 v1(50.176,87.064) v1(50.913,87.064)
  Bottom Layer w2.5: v1@41.12,55.184 v1(41.12,55.667) 41.12,55.692 41.12,56.251 41.12,61.796 44.643,65.319 50.442,65.319 60.145,65.319 72.819,77.993 72.819,82.032 72.819,82.692 72.819,82.743 72.819,82.768 v1@72.819,82.819
  other v1: 40.485,55.057 41.806,55.057 41.806,55.667 40.485,55.692 41.095,56.251 72.845,82.032 72.032,82.743 73.581,82.768
3.3V_AUX0: J1.24 J1.39 J1.41 | length 17
  Top Layer w0.635: J1.24@52.325,75.827 54.999,75.827 55.778,76.606 55.778,80.675 56.93,81.827 ; J1.39@60.525,81.827 56.93,81.827 ; J1.41@60.525,82.627 57.73,82.627 56.93,81.827
5V: C49.2 D5.1 U4.3 USB1.1 | length 24.1
  Top Layer w0.5: U4.3@3.954,54.983 4.134,54.803 v1(4.976,54.803) 5.763,54.803 7.553,53.014 C49.2@7.553,52.339 7.553,51.563 6.475,50.485 USB1.1@5.16,50.485 ; v1(16.711,57.521) 16.719,57.529 D5.1@18.888,57.529
  Bottom Layer w0.5: v1(4.976,54.803) 4.976,55.463 7.033,57.521 v1(16.711,57.521)
5VD: C9.1 C10.1 C11.1 C12.1 C18.1 C19.1 D5.2 J3.1 J4.1 L1.2 pad.0@18.895,50.587 R1.1 R17.2 R18.1 R42.1 | length 165.5
  Top Layer w0.3: R1.1@14.896,30.571 17.219,30.571 19.048,32.4 19.479,32.4 ; v1@18.895,53.243 18.895,53.355 18.895,54.429 D5.2@18.895,54.742 ; v1(20.114,33.67) 20.47,34.026 R42.1@21.878,34.026
  Top Layer w0.508: 66.077,85.794 66.096,85.825 66.464,86.194 66.712,85.946 66.712,85.794 66.407,85.489 66.407,85.311
  Top Layer w1: 37.94,9.627 J4.1@39.421,9.627
  Top Layer w1.27: R17.2@65.225,85.794 66.077,85.794
  Top Layer w1.5: L1.2@18.456,41.189 18.895,40.75 20.114,39.531 20.114,37.353 v1(20.114,33.67) v1(20.114,32.959) v1(20.114,32.248) ; J3.1@27.402,8.214 26.861,8.214 22.273,12.802 22.273,21.707 23.543,22.977 24.001,22.977 25.372,22.977 v1(26.871,22.977) v1(27.43,22.977) v1(27.963,22.977) ; 35.405,23.002 35.685,23.002 35.837,23.002 35.862,23.002 35.926,22.939 36.5,22.365 36.5,20.259 36.5,18.735 36.5,11.067 37.94,9.627
  Top Layer w2.5: L1.2@18.895,40.75 18.895,41.189 18.895,45.888 pad.0@18.895,50.587 18.895,52.187 v1(18.895,52.72)
  Bottom Layer w0.3: 18.032,56.378 18.895,55.514
  Bottom Layer w1.5: v1(20.114,33.67) v1(20.114,32.959) v1(20.114,32.248) 20.114,25.237 22.375,22.977 v1(26.871,22.977) v1(27.43,22.977) v1(27.963,22.977) 29.86,22.977 ; 30.15,23.012 35.05,23.012 35.685,23.012 35.837,23.012 35.939,23.012
  Bottom Layer w2.5: 18.895,53.025 18.895,53.355 18.895,55.514 18.895,60.226 48.204,89.535 60.693,89.535 65.568,84.661 65.631,84.597 v1@65.657,84.572
  other v1: 35.685,22.697 35.05,23.002 35.837,23.332 18.87,52.187 18.311,52.771 19.454,52.771 18.87,53.355 65.631,83.835 66.088,84.216 65.25,84.343 65.733,84.623 66.165,85.131
5VD_E_G: C26.1 J1.42 J1.46 J1.48 R18.2 | length 7.3
  Top Layer w0.102: v1@50.787,84.624 v1@50.811,84.6
  Top Layer w0.508: J1.42@52.325,83.027 51.071,83.027 50.829,83.269 50.786,83.312 50.786,83.947 50.786,84.625 v1@50.786,84.627 ; J1.46@52.325,84.627 50.795,84.627 v1@50.786,84.627 ; J1.48@52.325,85.427 51.071,85.427 50.879,85.235 50.786,85.142 50.786,84.633 v1@50.786,84.627
  Bottom Layer w0.508: v1@50.786,84.066 50.799,84.066 50.799,84.6 v1@50.811,84.6
  other v1: 62.532,77.841 63.244,77.841 63.879,77.917 62.532,78.501 63.25,78.5 64,78.5 50.795,83.236 50.77,83.947 50.795,84.633 50.795,85.319
12V: C5.1 C15.1 C22.1 C48.1 J2.1 R6.2 R14.2 U1.3 U3.3 | length 79.3
  Top Layer w2: 11.148,36.413 10.056,36.413 8.151,36.413 7.821,36.413 6.398,34.991 6.398,17.227 J2.1@13.793,9.832 ; J2.1@13.975,9.7 17.25,9.7 18.062,10.512 18.062,18.846 18.057,18.851 18.057,24.323 21.816,28.082 25.728,28.082 C22.1@27.861,30.216 ; C22.1@27.861,30.241 27.861,30.749 27.861,39.919 29.589,41.646 29.69,41.646 31.646,41.646 32.713,41.646
CTS2_N: 1.15 JP2.2 | length 11.6
  Top Layer w0.2: JP2.2@67.102,65.837 68.397,67.132 70.175,67.132 74.853,71.81 1.15@76.27,71.81
CTS3_N: 1.9 JP2.4 | length 17.2
  Top Layer w0.2: 1.9@76.264,79.436 1.9@76.27,79.43 76.284,79.416 v1(77.595,79.416)
  Bottom Layer w0.2: JP2.4@67.102,68.377 67.851,68.377 77.595,78.12 v1(77.595,79.416)
D+: U5.1 USB1.3 | length 7
  Top Layer w0.2: USB1.3@5.006,49.07 5.063,49.07 USB1.3@5.433,49.07 ; USB1.3@5.096,49.088 USB1.3@5.579,49.088 ; USB1.3@5.56,49.07 USB1.3@5.579,49.088 ; U5.1@10.555,47.574 10.555,48.4 9.867,49.088 USB1.3@5.579,49.088
D-: U5.2 USB1.2 | length 8
  Top Layer w0.2: USB1.2@4.571,49.723 USB1.2@5.053,49.723 ; USB1.2@5.006,49.72 5.025,49.701 5.028,49.698 USB1.2@5.053,49.723 ; U5.2@11.055,47.574 11.055,48.47 9.802,49.723 5.063,49.723 USB1.2@5.053,49.723
ESW_DBG_B: 1.81 JP4.24 | length 10.7
  Top Layer w0.2: 1.81@126.27,59.11 135.199,59.11 JP4.24@136.469,60.38
ESW_DTEST: 1.76
ESW_P0_LED_0: 1.75 D0.2 | length 4.3
  Top Layer w0.3: 1.75@126.27,51.49 129.349,51.49 129.792,51.933 D0.2@130.401,51.933
ESW_P1_LED_0: 1.74 D1.2 | length 4.2
  Top Layer w0.3: 1.74@126.27,50.22 126.338,50.288 D1.2@130.401,50.288
ESW_P2_LED_0: 1.73 D2.2 | length 4.3
  Top Layer w0.3: 1.73@126.27,48.95 130.095,48.95 D2.2@130.401,48.644
ESW_P3_LED_0: 1.72 D3.1 | length 4.4
  Top Layer w0.3: 1.72@126.27,47.68 128.583,47.68 129.264,46.999 D3.1@130.376,46.999
ESW_P4_LED_0: 1.71 D4.2 | length 4.6
  Top Layer w0.3: 1.71@126.27,46.41 127.771,46.41 128.826,45.354 D4.2@130.401,45.354
ESW_TXVN_A_P0: 1.29 T1.23 | length 25.2
  Top Layer w0.2: T1.23@62.922,36.478 62.922,37.052 62.585,37.39 62.585,42.834 74.234,54.483 75.817,54.483 1.29@76.27,54.03
ESW_TXVN_A_P1: 1.37 T1.11 | length 12
  Top Layer w0.2: T1.11@75.162,36.478 75.162,37.052 74.825,37.39 74.825,41.136 75.464,41.775 80.218,41.775 80.95,42.507 1.37@80.95,43
ESW_TXVN_A_P2: 1.46 T2.23 | length 7.3
  Top Layer w0.2: T2.23@91.243,36.478 91.243,37.052 90.906,37.39 90.906,41.076 92.38,42.55 1.46@92.38,43
ESW_TXVN_A_P3: 1.55 T2.11 | length 6.9
  Top Layer w0.2: T2.11@103.483,36.478 103.483,37.052 103.146,37.39 103.146,41.911 103.81,42.576 1.55@103.81,43
ESW_TXVN_A_P4: 1.64 T3.11 | length 9.6
  Top Layer w0.2: 1.64@115.24,43 114.803,42.563 114.803,40.62 115.928,39.495 118.387,39.495 119.378,38.503 119.378,37.73 119.733,37.375 T3.11@119.733,37.055
ESW_TXVN_B_P0: 1.31 T1.20 | length 21.3
  Top Layer w0.2: T1.20@65.982,36.478 65.982,37.052 65.645,37.39 65.645,43.252 74.336,51.943 75.817,51.943 1.31@76.27,51.49
ESW_TXVN_B_P1: 1.39 T1.8 | length 11.4
  Top Layer w0.2: 77.885,38.703 77.885,37.39 78.222,37.052 T1.8@78.222,36.478
  Top Layer w0.203: 77.886,38.525 77.886,40.553 78.307,40.973 81.324,40.973 82.125,41.773 82.897,41.773 83.49,42.367 1.39@83.49,43
ESW_TXVN_B_P2: 1.48 T2.20 | length 7.1
  Top Layer w0.2: T2.20@94.303,36.478 94.303,37.052 93.966,37.39 93.966,41.723 94.92,42.677 1.48@94.92,43
ESW_TXVN_B_P3: 1.57 T2.8 | length 6.7
  Top Layer w0.2: 1.57@106.35,43 106.206,42.856 106.206,37.39 106.543,37.052 T2.8@106.543,36.478
ESW_TXVN_B_P4: 1.66 T3.8 | length 11.5
  Top Layer w0.2: 1.66@117.78,43 117.362,42.582 117.362,40.861 117.679,40.545 122.578,40.545 123.077,40.046 123.077,38.086 123.543,37.62 T3.8@123.543,37.055
ESW_TXVN_C_P0: 1.33 T1.17 | length 17.5
  Top Layer w0.2: T1.17@69.042,36.478 69.042,37.052 68.705,37.39 68.705,43.721 74.361,49.378 75.842,49.378 1.33@76.27,48.95
ESW_TXVN_C_P1: 1.41 T1.5 | length 8.3
  Top Layer w0.2: T1.5@81.188,37.695 80.988,37.895 80.988,39.952 81.188,40.152 81.924,40.152 82.745,40.972 84.495,40.972 85.838,42.314 1.41@85.838,42.445
ESW_TXVN_C_P2: 1.50 T2.17 | length 6.8
  Top Layer w0.2: T2.17@97.363,36.478 97.363,37.052 97.026,37.39 97.026,42.566 1.50@97.46,43
ESW_TXVN_C_P3: 1.59 T2.5 | length 6.3
  Top Layer w0.2: 1.59@108.618,42.325 108.618,41.973 109.266,41.326 109.266,37.39 109.603,37.052 T2.5@109.603,36.478
ESW_TXVN_C_P4: 1.68 T3.5 | length 11.7
  Top Layer w0.2: 1.68@120.32,43 119.902,42.582 119.902,41.801 120.359,41.345 125.978,41.345 126.928,40.395 126.928,38.085 T3.5@127.218,37.795
ESW_TXVN_D_P0: 1.35 T1.14 | length 13.6
  Top Layer w0.2: T1.14@72.102,36.478 72.102,37.052 71.765,37.39 71.765,44.109 74.519,46.863 75.817,46.863 1.35@76.27,46.41
ESW_TXVN_D_P1: 1.43 T1.2 | length 9.6
  Top Layer w0.2: T1.2@84.342,36.478 84.342,37.052 84.005,37.39 84.005,40.002 84.175,40.172 86.951,40.172 88.108,41.329 88.108,42.084 1.43@88.478,42.455
ESW_TXVN_D_P2: 1.52 T2.14 | length 6.7
  Top Layer w0.2: 1.52@100,43 100.086,42.914 100.086,37.39 100.423,37.052 T2.14@100.423,36.478
ESW_TXVN_D_P3: 1.61 T2.2 | length 7.4
  Top Layer w0.2: 1.61@111.43,43 110.968,42.538 110.968,41.758 112.314,40.411 112.314,37.415 112.663,37.066 T2.2@112.663,36.478
ESW_TXVN_D_P4: 1.70 T3.2 | length 12.2
  Top Layer w0.2: 1.70@122.86,43 122.86,42.433 123.098,42.195 127.98,42.195 130.678,39.497 130.678,37.804 131.163,37.319 T3.2@131.163,37.055
ESW_TXVP_A_P0: 1.28 T1.24 | length 25.8
  Top Layer w0.2: T1.24@61.902,36.478 61.902,37.032 62.229,37.359 62.229,42.981 74.087,54.839 75.809,54.839 1.28@76.27,55.3
ESW_TXVP_A_P1: 1.36 T1.12 | length 10.6
  Top Layer w0.2: T1.12@74.208,37.235 74.298,37.235 74.425,37.362 74.425,41.301 75.298,42.175 79.64,42.175 79.68,42.215 1.36@79.68,43
ESW_TXVP_A_P2: 1.45 T2.24 | length 7.2
  Top Layer w0.2: T2.24@90.223,36.478 90.223,37.032 90.55,37.359 90.55,41.228 91.435,42.113 91.435,42.675 1.45@91.11,43
ESW_TXVP_A_P3: 1.54 T2.12 | length 6.8
  Top Layer w0.2: T2.12@102.463,36.478 102.463,37.032 102.79,37.359 102.79,42.75 1.54@102.54,43
ESW_TXVP_A_P4: 1.63 T3.12 | length 9.6
  Top Layer w0.2: 1.63@113.97,43 113.992,43 114.403,42.589 114.403,40.454 115.762,39.095 118.221,39.095 118.867,38.449 118.867,37.778 118.463,37.375 T3.12@118.463,37.055
ESW_TXVP_B_P0: 1.30 T1.21 | length 21.9
  Top Layer w0.2: T1.21@64.962,36.478 64.962,37.032 65.289,37.359 65.289,43.399 74.188,52.299 75.809,52.299 1.30@76.27,52.76
ESW_TXVP_B_P1: 1.38 T1.9 | length 11.3
  Top Layer w0.2: T1.9@77.202,37.032 T1.9@77.202,36.478 77.485,36.76 77.485,39.045 ; 77.485,38.703 77.485,39.045 ; 1.38@82.22,43 82.22,42.437 81.158,41.375 78.048,41.375 77.485,40.812 77.485,39.045
ESW_TXVP_B_P2: 1.47 T2.21 | length 6.7
  Top Layer w0.2: T2.21@93.283,36.478 93.283,37.032 93.61,37.359 93.61,42.96 1.47@93.65,43
ESW_TXVP_B_P3: 1.56 T2.9 | length 7
  Top Layer w0.2: 1.56@105.08,43 105.08,42.591 105.85,41.82 105.85,37.359 105.523,37.032 T2.9@105.523,36.478
ESW_TXVP_B_P4: 1.65 T3.9 | length 11.5
  Top Layer w0.2: 1.65@116.51,43 116.962,42.548 116.962,40.696 117.513,40.145 122.413,40.145 122.677,39.88 122.677,38.094 122.273,37.69 T3.9@122.273,37.055
ESW_TXVP_C_P0: 1.32 T1.18 | length 18.1
  Top Layer w0.2: T1.18@68.022,36.478 68.022,37.032 68.349,37.359 68.349,43.869 74.214,49.733 75.783,49.733 1.32@76.27,50.22
ESW_TXVP_C_P1: 1.40 T1.6 | length 8.6
  Top Layer w0.2: T1.6@80.408,37.705 80.588,37.885 80.588,40.185 80.955,40.552 81.759,40.552 82.579,41.372 84.329,41.372 84.76,41.802 1.40@84.76,43
ESW_TXVP_C_P2: 1.49 T2.18 | length 6.9
  Top Layer w0.2: 1.49@96.19,43 96.67,42.52 96.67,37.359 96.343,37.032 T2.18@96.343,36.478
ESW_TXVP_C_P3: 1.58 T2.6 | length 7.2
  Top Layer w0.2: 1.58@107.62,43 107.62,42.469 108.91,41.179 108.91,37.359 108.583,37.032 T2.6@108.583,36.478
ESW_TXVP_C_P4: 1.67 T3.6 | length 12.1
  Top Layer w0.2: 1.67@119.05,43 119.502,42.548 119.502,41.636 120.193,40.945 125.812,40.945 126.528,40.229 126.528,38.095 T3.6@126.198,37.765 ; T3.6@126.083,37.055 T3.6@126.083,37.375
ESW_TXVP_D_P0: 1.34 T1.15 | length 14.2
  Top Layer w0.2: T1.15@71.082,36.478 71.082,37.032 71.409,37.359 71.409,44.256 74.371,47.219 75.809,47.219 1.34@76.27,47.68
ESW_TXVP_D_P1: 1.42 T1.3 | length 10.2
  Top Layer w0.2: T1.3@83.322,36.478 83.322,37.032 83.605,37.315 83.605,40.272 83.905,40.572 86.785,40.572 87.708,41.494 87.708,42.065 87.3,42.473 1.42@87.3,43
ESW_TXVP_D_P2: 1.51 T2.15 | length 7.1
  Top Layer w0.2: 1.51@98.73,43 98.73,42.667 99.73,41.667 99.73,37.359 99.403,37.032 T2.15@99.403,36.478
ESW_TXVP_D_P3: 1.60 T2.3 | length 7.4
  Top Layer w0.2: 1.60@110.16,43 110.612,42.548 110.612,41.61 111.958,40.264 111.958,37.461 111.643,37.146 T2.3@111.643,36.478
ESW_TXVP_D_P4: 1.69 T3.3 | length 13
  Top Layer w0.2: 1.69@121.59,43 121.706,42.884 121.706,42.307 122.268,41.745 127.865,41.745 130.278,39.331 130.278,37.802 129.893,37.417 T3.3@129.893,37.055
GE2_RXCLK: 1.91 JP4.14 | length 10.7
  Top Layer w0.2: 1.91@126.27,71.81 135.199,71.81 JP4.14@136.469,73.08
GE2_RXD0: 1.89 JP4.16 | length 10.7
  Top Layer w0.2: 1.89@126.27,69.27 135.199,69.27 JP4.16@136.469,70.54
GE2_RXD1: 1.88 JP4.17 | length 7.7
  Top Layer w0.2: 1.88@126.27,68 JP4.17@133.929,68
GE2_RXD2: 1.87 JP4.18 | length 10.7
  Top Layer w0.2: 1.87@126.27,66.73 135.199,66.73 JP4.18@136.469,68
GE2_RXD3: 1.86 JP4.19 | length 7.7
  Top Layer w0.2: 1.86@126.27,65.46 JP4.19@133.929,65.46
GE2_RXDV: 1.90 JP4.15 | length 7.7
  Top Layer w0.2: 1.90@126.27,70.54 JP4.15@133.929,70.54
GE2_TXCLK: 1.85 JP4.20 | length 10.7
  Top Layer w0.2: 1.85@126.27,64.19 135.199,64.19 JP4.20@136.469,65.46
GE2_TXD0: 1.80 JP4.25 | length 7.7
  Top Layer w0.2: 1.80@126.27,57.84 JP4.25@133.929,57.84
GE2_TXD1: 1.79 JP4.26 | length 10.7
  Top Layer w0.2: 1.79@126.27,56.57 135.199,56.57 JP4.26@136.469,57.84
GE2_TXD2: 1.78 JP4.27 | length 7.7
  Top Layer w0.2: 1.78@126.27,55.3 JP4.27@133.929,55.3
GE2_TXD3: 1.77 JP4.28 | length 10.7
  Top Layer w0.2: 1.77@126.27,54.03 135.199,54.03 JP4.28@136.469,55.3
GE2_TXEN: 1.84 JP4.21 | length 7.7
  Top Layer w0.2: 1.84@126.27,62.92 JP4.21@133.929,62.92